# Altium PCB PCB.PcbDoc
Units mm, origin at the board's own origin, x right, y up, seen from the top; angles counter-clockwise.
Board outline 149 x 88.5 mm, 2 copper layers (Top Layer, Bottom Layer); 14 components, 12 nets, 141 pads, 0 vias.
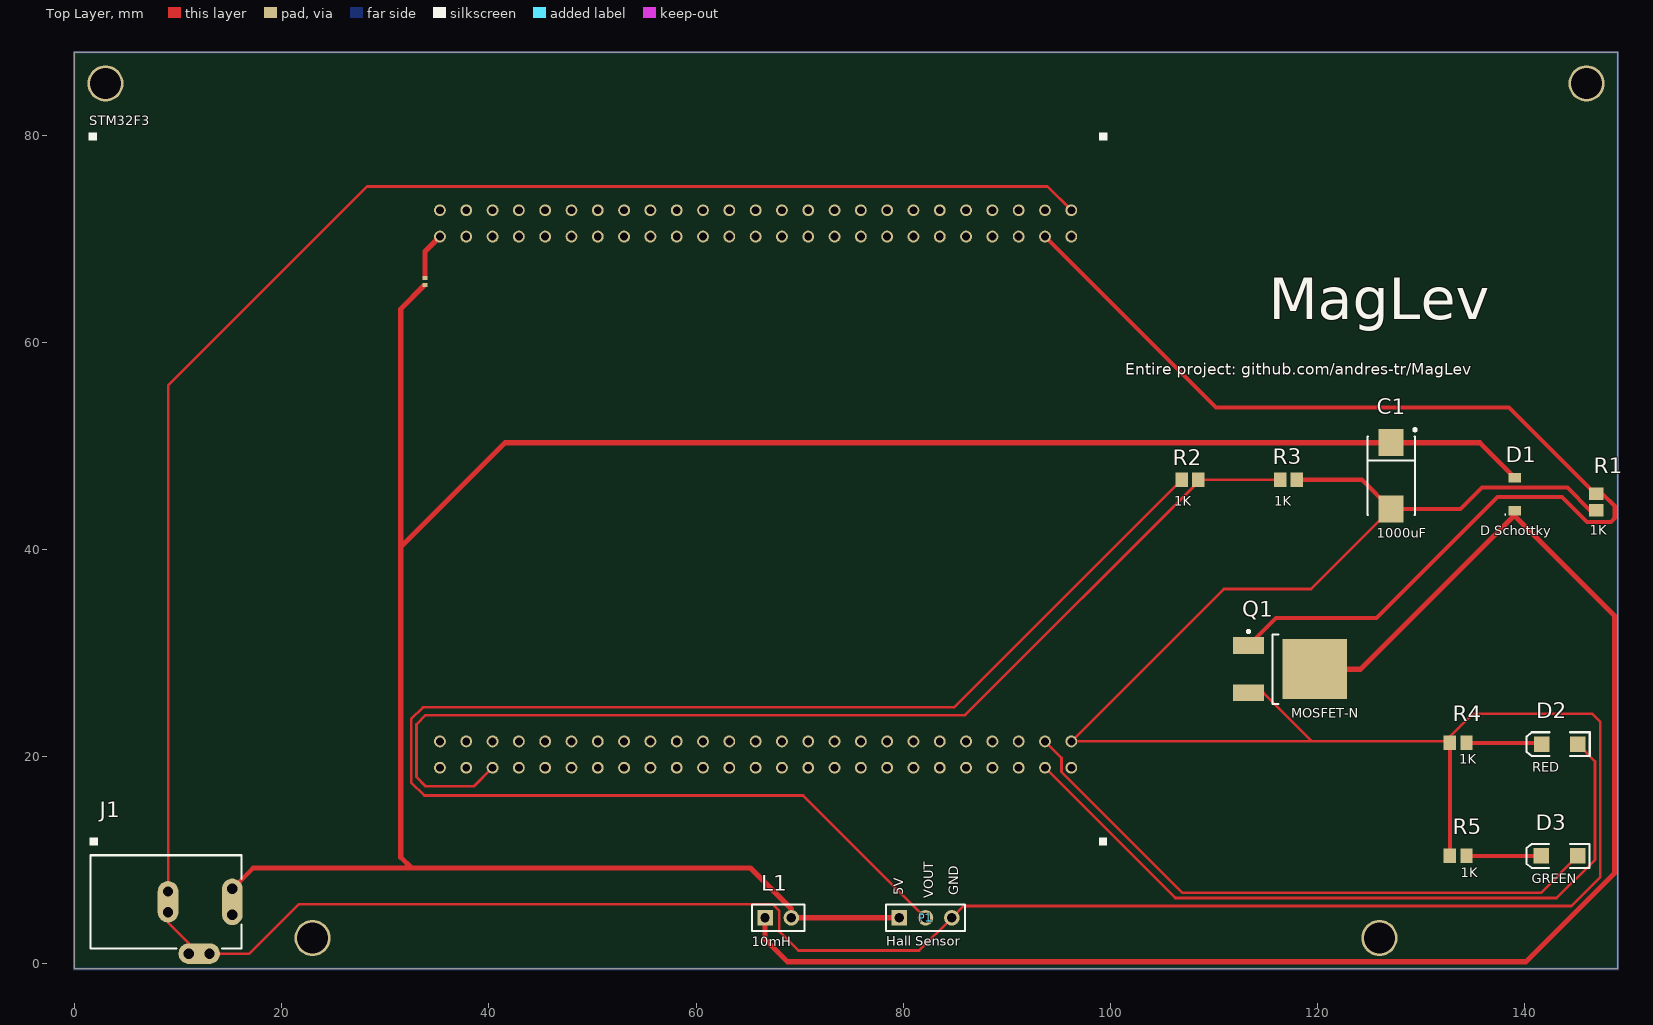
[diagram p0: Top Layer view]
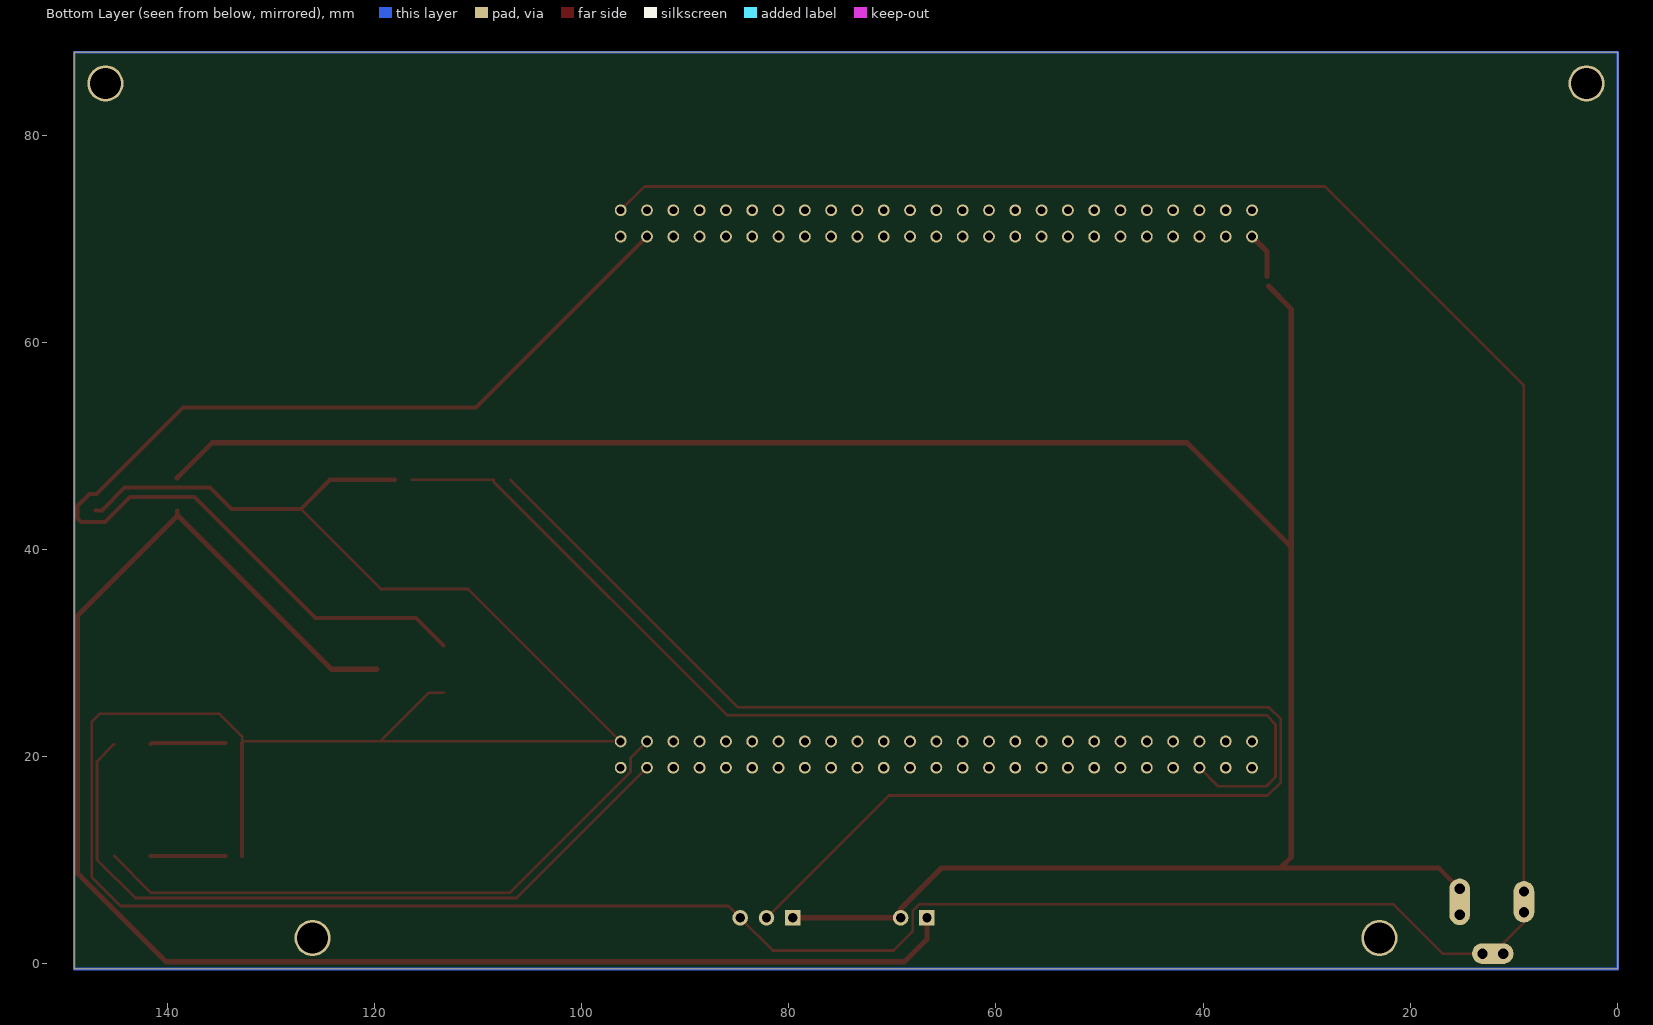
[diagram p1: Bottom Layer view, seen from below]

## Layer stack, top to bottom
Top Solder: solder mask 0.0102, Solder Resist, Dk 3.5
Top Layer: signal copper 0.0356
Dielectric 1: dielectric 0.32, FR-4, Dk 4.8
Bottom Layer: signal copper 0.0356
Bottom Solder: solder mask 0.0102, Solder Resist, Dk 3.5

## Board outline
-0.018,-0.508 148.982,-0.508 148.982,87.992 -0.018,87.992

## Design rules (kind name [scope] priority, off if disabled: settings)
Clearance [All] p1: gap=0.254
HoleSize [All] p1: absolutevalues=TRUE maxlimit=3.54 minlimit=0.025 maxpercent=80.000 minpercent=20.000
MinimumSolderMaskSliver [All] p1: minsoldermaskwidth=0.197
PolygonConnect [All] p1: connectstyle=Relief reliefconductorwidth=0.254 reliefentries=4 polygonreliefangle="90 Angle" airgapwidth=0.254
RoutingVias [All] p1: holewidth=0.711 width=1.27 viastyle="Through Hole" minholewidth=0.711 minwidth=1.27 maxholewidth=0.711 maxwidth=1.27
SilkToSolderMaskClearance [IsPad] p1: minsilkscreentomaskgap=0.2 clearancetoexposedcopper=TRUE
SolderMaskExpansion [All] p1: expansion=0.102
Width [All] p1: maxlimit=0.5 minlimit=0.254 preferedwidth=0.254 bottomlayer_maxwidth=0.4 minimp=50.000000 maximp=50.000000 favimp=50.000000
27 further rules are at their usual default settings.

## Components (designator, comment, footprint, x,y, rotation, side; value= is the part's Value field where it differs from the comment)
C1 "1000uF" D 127.117,47.109 r270 top
D1 "D Schottky" SOD-123FL 139.055,45.331 r90 top
D2 "RED" 3.2X1.6X1.1 143.397,21.201 r180 top
D3 "GREEN" 3.2X1.6X1.1 143.373,10.406 r180 top
J1 "PWR2.5" KLD-0202 1.525,5.975 r0 top
L1 "10mH" HDR1X2 66.665,4.437 r0 top
P1 "Hall Sensor" HDR1X3 79.619,4.437 r0 top
Q1 "MOSFET-N" DPAK229P991X238-3N 117.801,28.44 r0 top
R1 "1K" 2029 146.929,44.569 r90 top
R2 "1K" 2029 107.686,46.728 r180 top
R3 "1K" 2029 117.211,46.728 r180 top
R4 "1K" 2029 133.594,21.328 r0 top
R5 "1K" 2029 133.594,10.406 r0 top
STM32F3 "STM32F3" STM32_MagLev 65.776,45.839 r90 top (schematic designator ST)

## Footprints (in the part's own frame and the unit in brackets; to place one, negate y for a bottom-side part, rotate by r counter-clockwise, add the part's x,y. Pads: shape width x height; smd on the part's side, far side on the other; paste and mask are expansions set on the pad)
3.2X1.6X1.1 [mm] "SMT LED; 2 Flat Leads"
  rect 1.5x1.5 smd: 1(-1.75,0) 2(1.75,0)
  silkscreen extent -2.9,-1.15 3.2,1.15
2029 [mm] "Chip Inductor, Body 2.0x1.2mm, IPC High Density"
  rect 1.2x1.4 smd: 1(-0.8,0) 2(0.8,0)
  body extent -1.1,-0.7 1.1,0.7, height 0.55
D [mm] "Capacitor, SM Tantalum; Body 7.3 x 4.3 mm (LxW typ)"
  rect 2.6x2.4 smd: 1(-3.2,0) 2(3.2,0)
  silkscreen extent -4.57,-2.3 3.8,2.43
DPAK229P991X238-3N [mm] "D-PAK, 3-Pads, Body 6,21x6,73mm (max), IPC Medium Density"
  rect 3x1.6 smd: 1(-4.45,2.29) 3(-4.45,-2.29)
  rect 6.2x5.8 smd: 2(1.95,0)
  silkscreen extent -4.57,-3.35 -1.55,3.76, body extent -3.79,-3.37 6.11,3.37, height 2.89
HDR1X2 [mm] "Connector; Header; 2 Position"
  rect 1.5x1.5 hole 0.9: 1(0,0)
  round 1.5 hole 0.9: 2(2.54,0)
  silkscreen extent -1.27,-1.27 3.81,1.27
HDR1X3 [mm] "Connector; Header; 3 Position"
  rect 1.5x1.5 hole 0.9: 1(0,0)
  round 1.5 hole 0.9: 2(2.54,0) 3(5.08,0)
  silkscreen extent -1.27,-1.27 6.35,1.27
KLD-0202 [mm] "DC Power Jack, 2.5mm, KLD Series, PCB Mount"
  oval 2x4.5 all layers, no hole: 1(13.7,0)
  round 1.5 hole 1: 1A(13.7,-1.25) 1B(13.7,1.25) 2A(7.5,-1) 2B(7.5,1) 3A(9.5,-5) 3B(11.5,-5)
  oval 2x4 all layers, no hole: 2(7.5,0)
  oval 4x2 all layers, no hole: 3(10.5,-5)
  silkscreen extent 0,-4.5 14.6,4.5
SOD-123FL [mil] "SODFL, 2-Leads, Body 1,65x3,70mm, IPC Medium Density"
  rect 36x48 smd: 1(-62.99,0) 2(62.99,0)
  silkscreen extent -79,34 -75,38, body extent -73,-37 73,37, height 53
STM32_MagLev [mil]
  round 45 hole 30: 1(-1059.57,1200.79) 2(-959.57,1200.79) 3(-1059.57,1100.79) 4(-959.57,1100.79) 5(-1059.57,1000.79) 6(-959.57,1000.79) 7(-1059.57,900.79) 8(-959.57,900.79) 9(-1059.57,800.79) 10(-959.57,800.79) 11(-1059.57,700.79) 12(-959.57,700.79) 13(-1059.57,600.79) 14(-959.57,600.79) 15(-1059.57,500.79) 16(-959.57,500.79) 17(-1059.57,400.79) 18(-959.57,400.79) 19(-1059.57,300.79) 20(-959.57,300.79) 21(-1059.57,200.79) 22(-959.57,200.79) 23(-1059.57,100.79) 24(-959.57,100.79) 25(-1059.57,0.79) 26(-959.57,0.79) 27(-1059.57,-99.21) 28(-959.57,-99.21) 29(-1059.57,-199.21) 30(-959.57,-199.21) 31(-1059.57,-299.21) 32(-959.57,-299.21) 33(-1059.57,-399.21) 34(-959.57,-399.21) 35(-1059.57,-499.21) 36(-959.57,-499.21) 37(-1059.57,-599.21) 38(-959.57,-599.21) 39(-1059.57,-699.21) 40(-959.57,-699.21) 41(-1059.57,-799.21) 42(-959.57,-799.21) 43(-1059.57,-899.21) 44(-959.57,-899.21) 45(-1059.57,-999.21) 46(-959.57,-999.21) 47(-1059.57,-1099.21) 48(-959.57,-1099.21) 49(-1059.57,-1199.21) 50(-959.57,-1199.21) 51(959.57,1200.79) 52(1059.57,1200.79) 53(959.57,1100.79) 54(1059.57,1100.79) 55(959.57,1000.79) 56(1059.57,1000.79) 57(959.57,900.79) 58(1059.57,900.79) 59(959.57,800.79) 60(1059.57,800.79) 61(959.57,700.79) 62(1059.57,700.79) 63(959.57,600.79) 64(1059.57,600.79) 65(959.57,500.79) 66(1059.57,500.79) 67(959.57,400.79) 68(1059.57,400.79) 69(959.57,300.79) 70(1059.57,300.79) 71(959.57,200.79) 72(1059.57,200.79) 73(959.57,100.79) 74(1059.57,100.79) 75(959.57,0.79) 76(1059.57,0.79) 77(959.57,-99.21) 78(1059.57,-99.21) 79(959.57,-199.21) 80(1059.57,-199.21) 81(959.57,-299.21) 82(1059.57,-299.21) 83(959.57,-399.21) 84(1059.57,-399.21) 85(959.57,-499.21) 86(1059.57,-499.21) 87(959.57,-599.21) 88(1059.57,-599.21) 89(959.57,-699.21) 90(1059.57,-699.21) 91(959.57,-799.21) 92(1059.57,-799.21) 93(959.57,-899.21) 94(1059.57,-899.21) 95(959.57,-999.21) 96(1059.57,-999.21) 97(959.57,-1099.21) 98(1059.57,-1099.21) 99(959.57,-1199.21) 100(1059.57,-1199.21)
  silkscreen extent -1355,-1335 1355,2535

## Part data
C1: library part T520D, "Polymer Tantalum Chip Capacitor, T520 Series - KO-CAP Polymer"
D1: "Schottky Diode"
D2 D3: library part LED3, "Typical BLUE SiC LED"
J1: "Low Voltage Power Supply Connector"
L1: library part Inductor, "Inductor"
P1: library part "Header 3", "Header, 3-Pin"
Q1: "N-Channel MOSFET"
R1 R2 R3 R4 R5: library part Res3, "Resistor"
STM32F3: "STM32F3 base"

## Free pads (board coordinates)
  round 3.5 hole 3: 0(2.982,84.992) 0(22.982,2.484) 0(125.982,2.484) 0(145.982,84.992)
  rect 0.5x0.4 smd: 2(33.825,66.225) 3(33.825,65.55)

## Nets (pads, with @x,y where several pads share a name; then routed paths per layer and width w, separated by ;. In a path a pad name is that pad's centre, name@x,y a point inside that pad or via, vN(x,y) a via of type N, cw(c..) or ccw(c..) an arc to the next point about the centre after c; other vN are vias at no path point)
3V: STM32F3.1
5V: pad.2 STM32F3.51 | length 4.5
  Top Layer w0.5: pad.2@33.825,66.35 33.825,68.761 STM32F3.51
5V_BARREL: C1.1 D1.2 J1.1 J1.1A J1.1B L1.2 P1.1 pad.3 | length 238.4
  Top Layer w0.4: J1.1B 17.25,9.25 ; L1.2 69.205,5.295
  Top Layer w0.5: 17.25,9.25 65.25,9.25 69.205,5.295 ; 32.515,9.25 31.486,10.279 31.486,40.251 ; pad.3@33.7,65.425 31.486,63.211 31.486,40.251 ; L1.2 P1.1 ; D1.2 135.677,50.309 C1.1 41.544,50.309 31.486,40.251
GND: C1.2 J1.2 J1.2A J1.2B J1.3 J1.3A J1.3B P1.3 Q1.3 R1.1 R3.1 R4.1 R5.1 STM32F3.50 STM32F3.100 | length 454.4
  Top Layer w0.254: STM32F3.100 93.938,75.05 28.25,75.05 9.025,55.825 J1.2B J1.2 J1.2A 9.025,3.975 J1.3 J1.3B 16.875,0.975 21.661,5.761 67.38,5.761 68.043,5.097 68.043,3.118 69.887,1.275 81.537,1.275 P1.3 85.842,5.58 144.516,5.58 147.31,8.374 147.31,23.36 146.548,24.122 134.972,24.122 132.794,21.944 R4.1 132.656,21.466 119.497,21.466 ; Q1.3 114.813,26.15 119.497,21.466 ; C1.2 119.395,36.187 110.957,36.187 STM32F3.50 119.497,21.466
  Top Layer w0.4: R3.1 124.298,46.728 C1.2 133.823,43.909 135.88,45.966 144.135,45.966 146.332,43.769 R1.1 ; R5.1 R4.1
LED_GREEN: D3.1 STM32F3.48 | length 59.7
  Top Layer w0.254: STM32F3.48 95.284,19.878 95.284,18.531 106.965,6.85 141.567,6.85 D3.1
LED_RED: D2.1 STM32F3.47 | length 71.7
  Top Layer w0.254: STM32F3.47 106.28,6.342 143.098,6.342 146.781,10.025 146.802,10.025 146.802,19.546 D2.1
NetD1_1: D1.1 L1.1 Q1.2 | length 153.4
  Top Layer w0.4: 139.055,43.22 D1.1 D1.1@139.055,43.33
  Top Layer w0.5: L1.1 66.665,2.36 68.831,0.194 140.146,0.194 148.707,8.755 148.707,33.568 139.055,43.22 ; Q1.2 124.165,28.44 D1.1@139.055,43.33
NetD2_2: D2.2 R4.2 | length 7.3
  Top Layer w0.4: R4.2 141.52,21.328 D2.2
NetD3_2: D3.2 R5.2 | length 7.2
  Top Layer w0.4: R5.2 D3.2
PWM: Q1.1 R1.2 STM32F3.97 | length 109.4
  Top Layer w0.4: STM32F3.97 110.195,53.713 138.509,53.713 146.853,45.369 R1.2 147.526,45.369 148.707,44.188 148.707,43.045 148.326,42.664 146.04,42.664 143.627,45.077 137.404,45.077 125.72,33.393 116.014,33.393 Q1.1
SENSOR_OUTPUT: R2.1 R3.2 STM32F3.5 | length 106.9
  Top Layer w0.254: STM32F3.5 38.567,17.137 33.899,17.137 33.01,18.026 33.01,23.106 33.899,23.995 85.992,23.995 108.486,46.489 R2.1 R3.2
SENSOR_VOUT: P1.2 R2.2 | length 145.1
  Top Layer w0.254: P1.2 70.348,16.248 33.772,16.248 32.502,17.518 32.502,23.614 33.645,24.757 84.915,24.757 R2.2
pads on no net: STM32F3.2 STM32F3.3 STM32F3.4 STM32F3.6 STM32F3.7 STM32F3.8 STM32F3.9 STM32F3.10 STM32F3.11 STM32F3.12 STM32F3.13 STM32F3.14 STM32F3.15 STM32F3.16 STM32F3.17 STM32F3.18 STM32F3.19 STM32F3.20 STM32F3.21 STM32F3.22 STM32F3.23 STM32F3.24 STM32F3.25 STM32F3.26 STM32F3.27 STM32F3.28 STM32F3.29 STM32F3.30 STM32F3.31 STM32F3.32 STM32F3.33 STM32F3.34 STM32F3.35 STM32F3.36 STM32F3.37 STM32F3.38 STM32F3.39 STM32F3.40 STM32F3.41 STM32F3.42 STM32F3.43 STM32F3.44 STM32F3.45 STM32F3.46 STM32F3.49 STM32F3.52 STM32F3.53 STM32F3.54 STM32F3.55 STM32F3.56 STM32F3.57 STM32F3.58 STM32F3.59 STM32F3.60 STM32F3.61 STM32F3.62 STM32F3.63 STM32F3.64 STM32F3.65 STM32F3.66 STM32F3.67 STM32F3.68 STM32F3.69 STM32F3.70 STM32F3.71 STM32F3.72 STM32F3.73 STM32F3.74 STM32F3.75 STM32F3.76 STM32F3.77 STM32F3.78 STM32F3.79 STM32F3.80 STM32F3.81 STM32F3.82 STM32F3.83 STM32F3.84 STM32F3.85 STM32F3.86 STM32F3.87 STM32F3.88 STM32F3.89 STM32F3.90 STM32F3.91 STM32F3.92 STM32F3.93 STM32F3.94 STM32F3.95 STM32F3.96 STM32F3.98 STM32F3.99
copper on no net: | length 475
  Bottom Layer w0.254: -0.018,-0.508 -0.018,87.992 148.982,87.992 148.982,-0.508 -0.018,-0.508

## Silkscreen, mask and mechanical layers (free items; w line width, h text height)
Top Overlay:
  text "MagLev" at 115.306,62.222 h4
  text "Entire project: github.com/andres-tr/MagLev" at 101.463,56.888 h1.1
  text "5V" at 80,6.596 h0.9 r90
  text "GND" at 85.334,6.596 h0.9 r90
  text "VOUT" at 82.921,6.342 h0.9 r90